# Altium PCB KC_Input_VAS_6L.PcbDoc
Units mil, origin at the board's own origin, x right, y up, seen from the top; angles counter-clockwise.
Board outline 6000 x 4000 mil, 6 copper layers (Component Side, Ground Plane (GND), Inner Layer 1, Inner Layer 2, Power Plane (VCC), Solder Side), stack 51.068 mil thick; 49 components, 30 nets, 110 pads, 0 vias.
Unrouted connection lines stored in the file: 80.
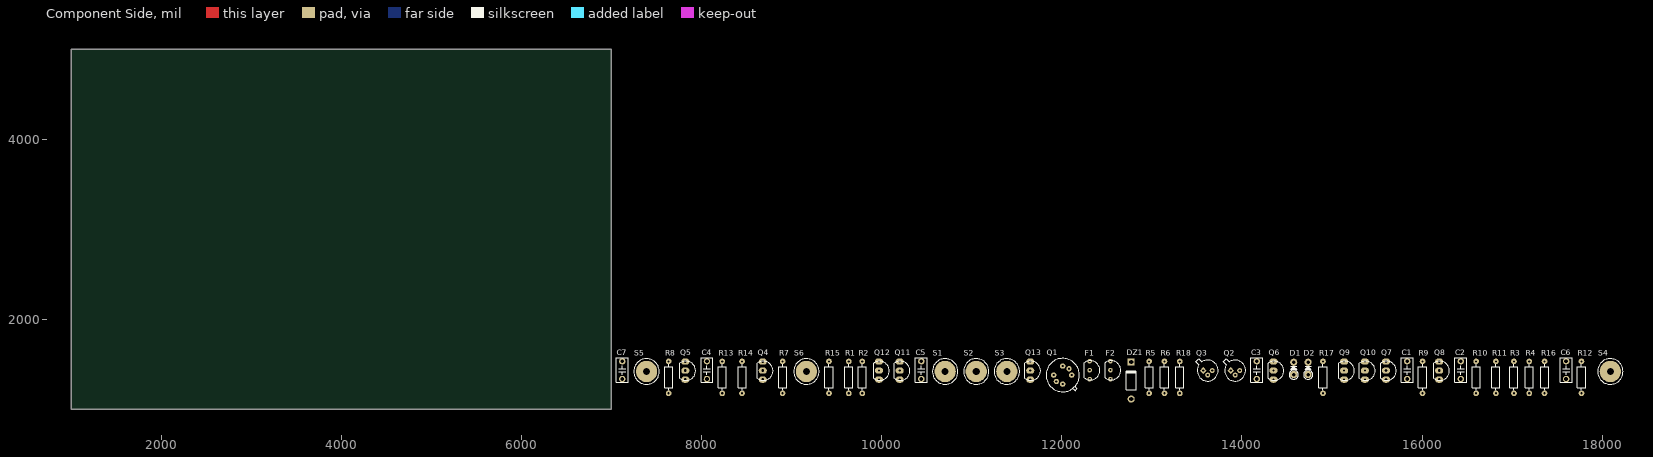
[diagram p0: Component Side view]
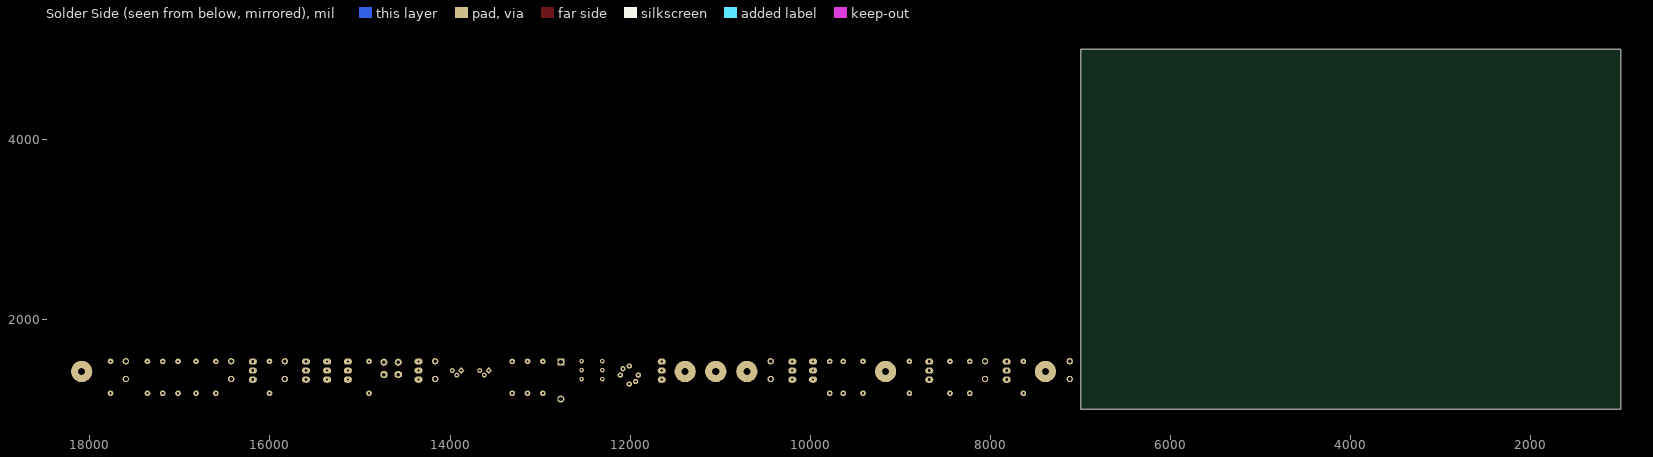
[diagram p1: Solder Side view, seen from below]
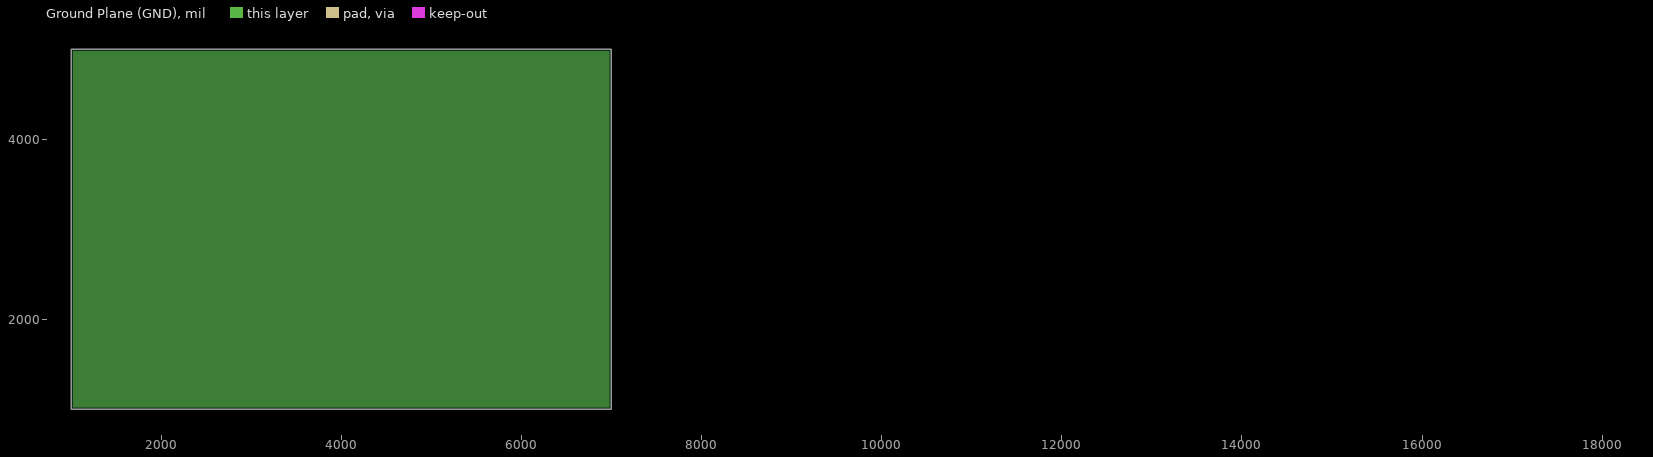
[diagram p2: Ground Plane (GND), clearances drawn from the general rule]
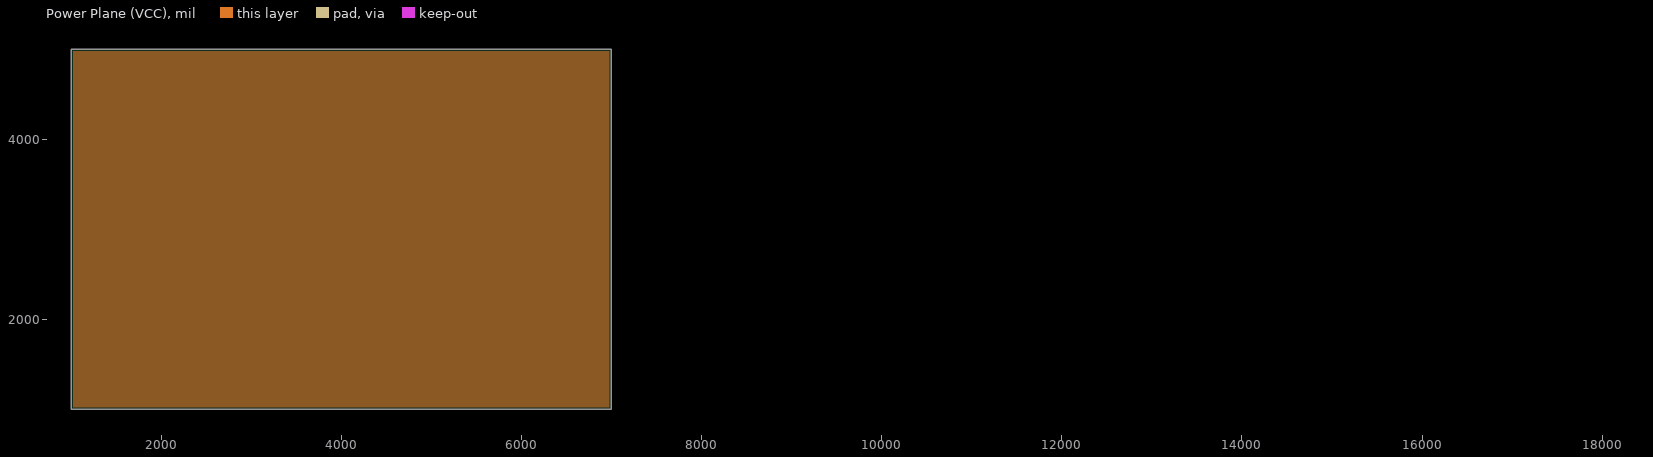
[diagram p3: Power Plane (VCC), clearances drawn from the general rule]

## Layer stack, top to bottom
Top Solder: solder mask 0.4, Solder Resist, Dk 3.5
Component Side: signal copper 1.4
Dielectric 1: core 12.6, FR-4, Dk 4.8
Ground Plane (GND): plane copper 1.417
Dielectric 3: prepreg 5, Dk 4.2
Inner Layer 1: signal copper 1.417
Dielectric 6: core 10, Dk 4.2
Inner Layer 2: signal copper 1.417
Dielectric 5: prepreg 5, Dk 4.2
Power Plane (VCC): plane copper 1.417
Dielectric 4: core 10, Dk 4.2
Solder Side: signal copper 1.4
Bottom Solder: solder mask 0.4, Solder Resist, Dk 3.5

## Board outline
1000,1000 7000,1000 7000,5000 1000,5000

## Design rules (kind name [scope] priority, off if disabled: settings)
Clearance [All] p1: gap=10 ignorepadtopadclearanceinfootprint=FALSE except(0: Arc-Hole Track-Hole SMDPad-Hole THPad-Hole Via-Hole Fill-Hole Poly-Hole Region-Hole Text-Hole)
PlaneClearance [All] p1: clearance=20
PlaneConnect [All] p1: planeconnectstyle=Relief reliefexpansion=20 reliefentries=4 reliefconductorwidth=10 reliefairgap=10
PolygonConnect [All] p1: connectstyle=Relief reliefconductorwidth=10 reliefentries=4 polygonreliefangle="90 Angle" airgapwidth=10
RoomDefinition KC_Input_VAS_Schematic [InComponentClass('KC_Input_VAS_Schematic')] p1: confinementstyle=ConfineIn formatcopy=TRUE lockcomponents=FALSE outline 7045,1065 18245,1065 18245,1675 7045,1675
RoutingVias [All] p1: holewidth=28 width=50 viastyle="Through Hole" minholewidth=28 minwidth=50 maxholewidth=28 maxwidth=50
SolderMaskExpansion [All] p1: expansion=4
Width [All] p1: maxlimit=10 minlimit=10 preferedwidth=10
28 further rules are at their usual default settings.

## Components (designator, comment, footprint, x,y, rotation, side; value= is the part's Value field where it differs from the comment)
C1 "2.2nF" "CBB 6.3*6.3*5" 15835,1435 r90 top
C2 "1nF" "CBB 6.3*6.3*5" 16430,1435 r90 top
C3 "100pF" "CBB 6.3*6.3*5" 14165,1435 r90 top
C4 "470pF" "CBB 6.3*6.3*5" 8060,1435 r90 top
C5 "1nF" "CBB 6.3*6.3*5" 10440,1435 r90 top
C6 ".01uF" "CBB 6.3*6.3*5" 17600,1435 r90 top
C7 ".01uF" "CBB 6.3*6.3*5" 7120,1435 r90 top
D1 "1N5298" DO-41V 14575,1385 r90 top
D2 "1N5298" DO-41V 14735,1385 r90 top
DZ1 "1N914" DO-41 12770,1320 r90 top
F1 "2SC1815" TO92A_SmallPad 12310,1535 r0 top
F2 "2SC1815" TO92A_SmallPad 12540,1535 r0 top
Q1 "MAT-02" TO78_SMALLHOLE 12010,1380 r0 top
Q2 "2N4391" TO-18_SMALLHOLE 13925,1430 r0 top
Q3 "2N4391" TO-18_SMALLHOLE 13620,1430 r0 top
Q4 "2SC1815" TO92A 8680,1530 r0 top
Q5 "2SC1815" TO92A 7820,1530 r0 top
Q6 "2N6730" TO92A_SmallHole 14350,1530 r0 top
Q7 "2SC1815" TO92A 15600,1530 r0 top
Q8 "2SC1815" TO92A 16190,1530 r0 top
Q9 "2SA935" TO92A_SmallHole 15135,1530 r0 top
Q10 "2SA935" TO92A_SmallHole 15365,1530 r0 top
Q11 "2SC2061" TO92A_SmallHole 10200,1530 r0 top
Q12 "2SC2061" TO92A_SmallHole 9970,1530 r0 top
Q13 "2SA1015" TO92A_SmallHole 11650,1530 r0 top
R1 "10R" "RS 1/4W" 9635,1355 r90 top
R2 "10R" "RS 1/4W" 9785,1355 r90 top
R3 "1K" "RS 1/4W" 17020,1355 r90 top
R4 "1K" "RS 1/4W" 17190,1355 r90 top
R5 "60.4R" "RS 1/4W" 12970,1355 r90 top
R6 "60.4R" "RS 1/4W" 13140,1355 r90 top
R7 "10K" "RS 1/4W" 8900,1355 r90 top
R8 "150R" "RS 1/4W" 7635,1355 r90 top
R9 "30.1R" "RS 1/4W" 16005,1355 r90 top
R10 "10R" "RS 1/4W" 16600,1355 r90 top
R11 "10R" "RS 1/4W" 16820,1355 r90 top
R12 "100R" "RS 1/4W" 17770,1355 r90 top
R13 "200R" "RS 1/4W" 8230,1355 r90 top
R14 "200R" "RS 1/4W" 8450,1355 r90 top
R15 "2K" "RS 1/4W" 9415,1355 r90 top
R16 "45.3R" "RS 1/4W" 17360,1355 r90 top
R17 "45.3R" "RS 1/4W" 14900,1355 r90 top
R18 "2K" "RS 1/4W" 13310,1355 r90 top
S1 "IN+" Screw-M2 10705,1420 r0 top
S2 "IN-" Screw-M2 11050,1420 r0 top
S3 "OUT" Screw-M2 11390,1420 r0 top
S4 "V+" Screw-M2 18090,1420 r0 top
S5 "V-" Screw-M2 7390,1420 r0 top
S6 "GND" Screw-M2 9165,1420 r0 top

## Footprints (in the part's own frame and the unit in brackets; to place one, negate y for a bottom-side part, rotate by r counter-clockwise, add the part's x,y. Pads: shape width x height; smd on the part's side, far side on the other; paste and mask are expansions set on the pad)
"CBB 6.3*6.3*5" [mm] "脚距5mm高6.3mm厚3mm"
  round 1.8 hole 1.1: 1(-2.5,0) 2(2.5,0)
  silkscreen extent -3.43,-1.65 3.43,1.65, body extent -3.15,-1.5 3.15,1.5, height 6.8
DO-41 [mm] "Diode, Axial; Body 5.2 x 2.7 mm (LxDia. max), Lead Dia. 0.86 mm (max)"
  round 2 hole 1.2: 1(-5.23,0)
  rect 2x2 hole 1.2: 2(5.23,0)
  silkscreen extent -2.65,-1.4 2.75,1.4
DO-41V [mm] "2.6*3.5mm(直径，脚距）"
  oct 2x2 hole 1: 1(0,0)
  round 2 hole 1: 2(3.5,0)
  silkscreen extent -1.3,-1.3 2.3,1.3, body extent -1.3,-1.3 3.9,1.3, height 6.9
"RS 1/4W" [mm] "直插色环电阻，脚距9mm，直径2.3mm"
  round 1.6 hole 0.6: 1(-4.5,0) 2(4.5,0)
  silkscreen extent -3.68,-1.14 3.68,1.14, body extent -4.72,-1.16 4.73,1.16, height 2.32
Screw-M2 [mm]
  round 6 hole 2: 1(0,0)
  silkscreen extent -3.59,-3.59 3.59,3.59
TO78_SMALLHOLE [mm]
  round 1.5 hole 0.61: 1(2.54,0) 2(1.796,1.796) 3(0,2.54) 5(-2.54,0) 7(0,-2.54)
  round 1.5 hole 0.61 paste+0: 6(-1.796,-1.796)
  silkscreen extent -4.7,-4.7 4.7,4.7
TO92A [mil]
  oval 90x70 hole 31.5: 1(0,0) 2(0,-100) 3(0,-200)
  silkscreen extent -60,-209 114,4
TO92A_SmallHole [mil]
  oval 90x70 hole 24.02: 1(0,0) 2(0,-100) 3(0,-200)
  silkscreen extent -60,-209 114,4
TO92A_SmallPad [mm]
  round 1.28 hole 0.61: 1(0,0) 2(0,-2.54) 3(0,-5.08)
  silkscreen extent -1.52,-5.32 2.89,0.09
TO-18_SMALLHOLE [mm] "Can; 3 Leads; Pin Circle Dia. 2.54 mm; Lead Dia. 0.48 mm (max)"
  rect 1.4x1.4 hole 0.61 rot 45: 1(-1.27,0)
  round 1.4 hole 0.61: 2(0,-1.27) 3(1.27,0)
  silkscreen extent -3.39,-2.95 2.95,3.39

## Part data
C1 C2 C3 C4 C5 C6 C7: library part C-CBB, "CBB电容", BOM名称=CBB电容, 学习资源=www.ooocke.com, 版权归属=源创客
D1 D2: library part 1N5xxx, "Current Regulator Diodes"
DZ1: library part 1N4619, "3V/0.5W稳压管", BOM名称=3V/0.5W稳压管, 学习资源=www.ooocke.com, 版权归属=源创客
F1 F2 Q4 Q5 Q7 Q8: "音频放大-NPN型"
Q1: "孪生对管-NPN型 40V/20ma"
Q2 Q3: "N沟道JFET开关管 40V/150ma"
Q6: library part 2N6728/6729/6730, "中功率放大-PNP型"
Q9 Q10: "音频功放-PNP型 50V/500ma"
Q11 Q12: "音频放大-NPN型 50V/500ma"
Q13: "音频放大-PNP型"
R1 R2 R3 R4 R5 R6 R7 R8 R9 R10 R11 R12 R13 R14 R15 R16 R17 R18: library part R-CRR, "直插色环电阻", BOM名称=色环电阻, 学习资源=www.ooocke.com, 版权归属=源创客
S1 S2 S3 S4 S5 S6: library part ScrewConnector, "Screw Connector"

## Nets (pads, with @x,y where several pads share a name; then routed paths per layer and width w, separated by ;. In a path a pad name is that pad's centre, name@x,y a point inside that pad or via, vN(x,y) a via of type N, cw(c..) or ccw(c..) an arc to the next point about the centre after c; other vN are vias at no path point)
GND: C6.2 C7.1 D1.2 D2.2 DZ1.1 R7.1 R18.2 S6.1
NetC1_1: C1.1 Q2.2 Q6.1 Q8.3 R3.1 R17.2
NetC1_2: C1.2 R9.1
NetC2_1: C2.1 R16.1
NetC2_2: C2.2 Q3.2 Q6.2 Q6.3 Q7.3 R4.1 R9.2
NetC3_1: C3.1 Q10.2 Q12.2 S3.1
NetC3_2: C3.2 R17.1
NetC4_1: C4.1 Q4.3 Q5.2 R7.2
NetC4_2: C4.2 Q4.1 Q5.3 R8.1
NetC5_1: C5.1 DZ1.2 Q9.2 Q11.2 Q13.1
NetC5_2: C5.2 Q11.3 Q12.3 Q13.2 R15.1
NetC6_1: C6.1 Q7.2 Q8.2 R3.2 R4.2 R12.2 R16.2 S4.1
NetC7_2: C7.2 Q5.1 R8.2 R13.1 R14.1 S5.1
NetD1_2: D1.1 Q7.1 Q9.3
NetD2_2: D2.1 Q8.1 Q10.3
NetF1_1: F1.1 Q1.3 R1.2 R5.1
NetF1_2: F1.2 Q1.1 Q2.1
NetF1_3: F1.3 Q1.2 S1.1
NetF2_1: F2.1 Q1.5 R2.2 R6.1
NetF2_2: F2.2 Q1.7 Q3.1
NetF2_3: F2.3 Q1.6 S2.1
NetQ2_2: Q2.3 R5.2
NetQ3_2: Q3.3 R6.2
NetQ4_2: Q4.2 R1.1 R2.1
NetQ9_1: Q9.1 R10.1
NetQ10_1: Q10.1 R11.1
NetQ11_1: Q11.1 R13.2 R15.2
NetQ12_1: Q12.1 R14.2
NetQ13_3: Q13.3 R18.1
NetR10_2: R10.2 R11.2 R12.1

## Polygon pours and split planes (outlines as drawn)
no net on Ground Plane (GND) (split plane): 6979.9,1020.1 1020.1,1020.1 1020.1,4979.9 6979.9,4979.9
no net on Power Plane (VCC) (split plane): 6979.9,1020.1 1020.1,1020.1 1020.1,4979.9 6979.9,4979.9